# Altium PCB верхняя плата версия 5.PcbDoc (part 2 of 2)
Units mm, origin at the board's own origin, x right, y up, seen from the top; angles counter-clockwise.
Board outline 53 x 45 mm, 4 copper layers (Top Layer, Layer 1, Layer 2, Bottom Layer), stack 1.083 mm thick; 122 components, 141 nets, 822 pads, 327 vias.
Unrouted connection lines stored in the file: 3.
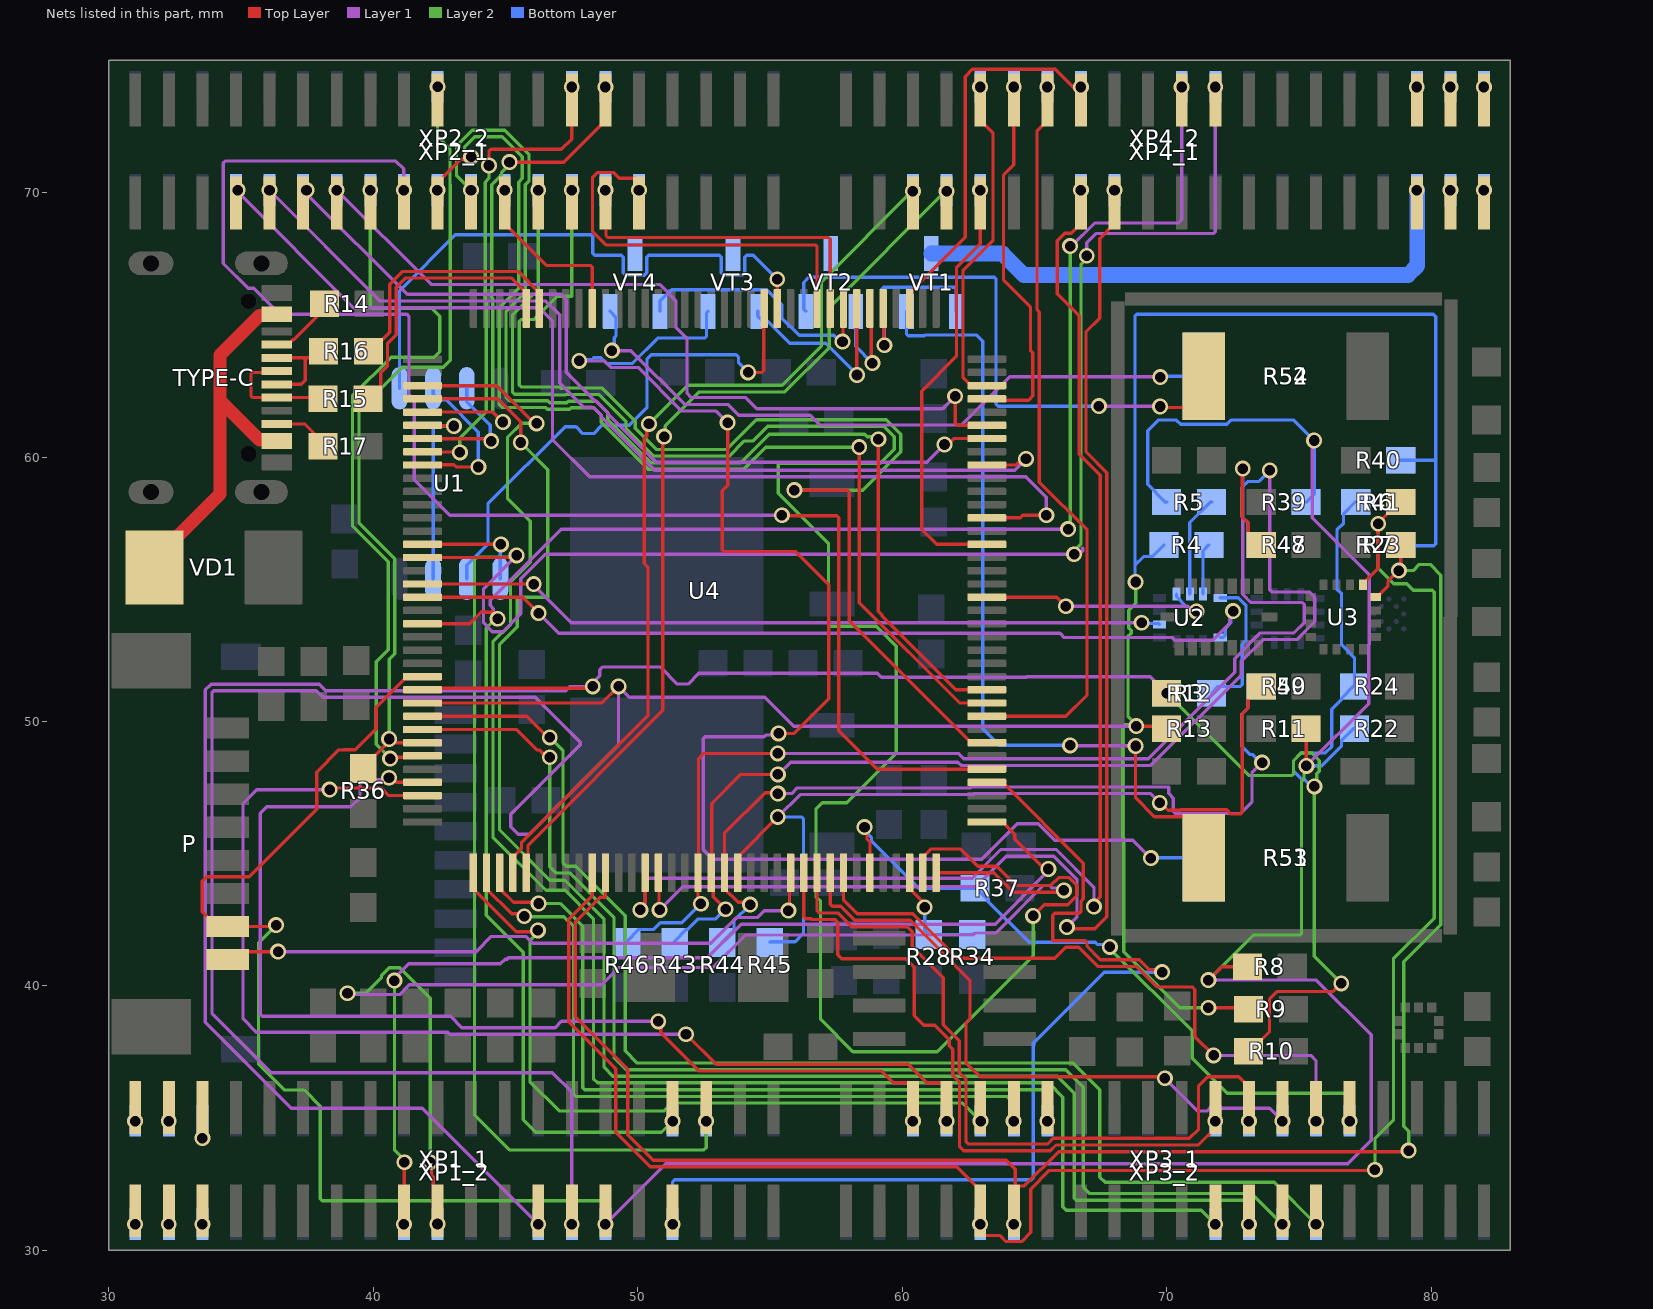
[diagram p4: the nets of this part, all layers, seen from the top]

## Via types
v1: diameter 0.6, hole 0.4, Top Layer to Bottom Layer, 327 vias

## Nets (pads, with @x,y where several pads share a name; then routed paths per layer and width w, separated by ;. In a path a pad name is that pad's centre, name@x,y a point inside that pad or via, vN(x,y) a via of type N, cw(c..) or ccw(c..) an arc to the next point about the centre after c; other vN are vias at no path point) (continued)
NetP_7: P.7 R5.2 R8.1 R11.1 R22.1 R39.1 U4.133 XP1_1.29 XP1_2.29 | length 124.7
  Top Layer w0.125: v1@36.275,42.25 P.7@34.5,42.25 34.1,42.25 33.538,42.813 33.538,43.967 33.695,44.125 35.305,44.125 37.862,46.683 37.862,48.087 38.7,48.925 38.879,48.925 38.891,48.937 39.328,48.937 40.113,49.723 40.113,50.548 41.265,51.7 U4.133@41.86,51.7 ; v1@71.575,40.225 72.075,40.725 R8.1@73.05,40.725 ; v1@75.275,48.325 R11.1@75.275,49.725
  Layer 1 w0.125: v1(48.777,30.993) 51.058,33.275 76.85,33.275 77.738,34.163 77.738,38.151 75.665,40.225 v1(71.575,40.225) ; v1(75.284,48.324) 77.637,50.678 77.637,52.902 77.663,52.927 77.663,55.545 75.5,57.707 75.5,60.552 75.573,60.625 v1(75.575,60.625)
  Layer 2 w0.125: v1(36.325,42.3) 35.663,41.637 35.663,37.041 36.636,36.068 37.382,36.068 38,35.45 38,31.948 38.073,31.875 48.625,31.875 48.777,31.723 v1(48.777,30.993) ; v1(71.575,40.225) 73.276,41.925 75.027,41.925 75.1,41.998 75.1,47.75 75.193,47.843 75.193,48.233 v1(75.284,48.324)
  Bottom Layer w0.125: R5.2@70,58.3 69.95,58.3 69.288,58.962 69.288,61.002 69.686,61.4 70.37,61.4 70.533,61.237 72.267,61.237 72.43,61.4 74.8,61.4 v1(75.575,60.625) 75.575,58.6 R39.1@75.275,58.3 ; v1(75.284,48.324) 75.861,48.324 76.612,49.076 76.612,49.288 77.05,49.725 R22.1@77.1,49.725
NetP_8: P.8 U4.25 | length 23.7
  Top Layer w0.125: P.8@34.5,41 34.8,41.3 v1(36.4,41.3) ; v1(55.694,42.85) 55.737,42.893 55.737,44.218 55.728,44.228 U4.25@55.78,44.28
  Layer 1 w0.125: v1(36.4,41.3) 43.893,41.3 44.467,41.874 45.761,41.874 46.023,41.612 52.756,41.612 53.731,42.587 54.517,42.587 54.78,42.85 v1(55.694,42.85)
NetR3_1: R3.1 U2.1 | length 5.4
  Bottom Layer w0.125: R3.1@71.7,51.075 71.95,51.325 72.789,51.325 72.862,51.398 72.862,52.931 73,53.069 73,54.374 72.699,54.675 U2.1@72.025,54.675
NetR3_2: R3.2 R10.1 R12.2 R24.2 R41.1 U4.134 XP1_1.25 XP1_2.25 | length 108.2
  Top Layer w0.125: U4.134@41.86,51.2 41.924,51.264 48.236,51.264 v1(48.3,51.327) ; R10.1@73.1,37.525 73.15,37.525 73.885,38.26 73.885,39.49 74.19,39.795 76.295,39.795 v1@76.6,40.1
  Layer 1 w0.125: v1(46.237,30.993) 41.849,35.381 36.894,35.381 33.65,38.625 33.65,51.193 33.87,51.412 37.956,51.412 38.206,51.162 47.286,51.162 47.45,51.327 48.198,51.327 48.3,51.225 48.3,51.456 48.568,51.723 48.568,51.949 48.683,52.065 50.85,52.065 51.498,51.416 51.902,51.416 52.313,51.827 59.063,51.827 59.215,51.675 64.698,51.675 64.711,51.688 69.387,51.688 v1(70,51.075)
  Layer 2 w0.125: v1(70,51.075) 73.118,47.957 74.723,47.957 74.796,48.03 74.796,48.526 75.082,48.811 75.486,48.811 75.771,48.526 75.771,48.122 75.678,48.029 75.678,47.639 v1(75.588,47.548) ; v1@75.575,47.525 75.575,41.125 v1(76.6,40.1)
  Bottom Layer w0.125: v1(75.588,47.548) 75.459,47.548 75.179,47.828 75.09,47.828 74.796,48.122 74.796,48.526 75.082,48.811 75.995,48.811 76.238,49.054 76.238,50.463 76.612,50.838 76.612,50.888 77.05,51.325 R24.2@77.1,51.325 77.1,52.408 76.612,52.895 76.612,54.831 76.437,55.006 76.437,57.242 76.687,57.492 76.687,57.863 77.125,58.3 R41.1@77.15,58.3
NetR4_1: R4.1 U2.14 | length 1.9
  Bottom Layer w0.125: U2.14@71.375,54.825 71.375,56.45 R4.1@71.6,56.675
NetR4_2: R4.2 R9.1 R13.1 R23.1 R40.1 U4.135 XP1_1.27 XP1_2.27 | length 142.5
  Top Layer w0.125: U4.135@41.86,50.7 48.648,50.7 v1(49.275,51.327) ; v1(68.85,49.825) 69.9,49.825 R13.1@70,49.725 ; v1(71.575,39.175) 73.05,39.175 R9.1@73.1,39.125
  Layer 1 w0.125: v1(47.507,30.993) 47.507,35.993 46.775,36.725 36.15,36.725 33.9,38.975 33.9,51.089 33.973,51.162 37.852,51.162 38.102,50.912 46.132,50.912 47.828,49.217 47.828,49.113 45.2,46.485 45.2,46.024 45.486,45.739 45.889,45.739 49.275,49.124 v1(49.275,51.327) 49.686,50.916 54.809,50.916 55.9,49.825 v1(68.85,49.825)
  Layer 2 w0.125: v1@68.8,49.875 68.425,49.875 68.337,49.788 68.337,45.625 68.375,45.588 68.375,41.286 70.486,39.175 v1(71.575,39.175) ; v1(68.827,55.275) 68.827,54.472 68.564,54.209 68.564,53.534 68.655,53.443 68.655,53.34 68.537,53.222 68.537,50.202 68.85,49.889 v1(68.85,49.825)
  Bottom Layer w0.125: v1(68.827,55.275) 68.8,55.302 68.8,55.914 ; R4.2@69.9,56.675 69.462,56.237 69.124,56.237 68.8,55.914 ; R23.1@78.85,56.675 78.875,56.65 80.102,56.65 80.175,56.723 80.175,59.925 ; R40.1@78.85,59.875 80.125,59.875 80.175,59.925 ; 68.8,55.914 68.8,65.327 68.873,65.4 80.075,65.4 80.175,65.3 80.175,59.925
NetR5_1: R5.1 U2.13 | length 3.8
  Bottom Layer w0.125: U2.13@70.875,54.825 70.875,57.525 71.65,58.3 R5.1@71.7,58.3
NetR6_1: R6.1 U3.16 U4.10 XP3_1.9 XP3_2.9 | length 75
  Top Layer w0.125: U4.10@48.28,44.28 48.28,43.413 47.387,42.521 47.387,38.649 49.167,36.869 49.167,34.474 50.479,33.163 62.062,33.163 62.787,32.438 62.947,32.278 v1(62.947,30.993) 62.947,30.728 63.112,30.563 63.7,30.563 63.925,30.338 64.512,30.338 64.855,30.68 64.855,32.32 65.56,33.025 v1@77.85,33.025 ; U3.16@77.425,55.175 77.425,55.225 78,55.8 78,57.375 78.025,57.4 v1@78.025,57.451 ; v1(78,57.476) v1@78.025,57.451 ; v1@78.051,57.426 v1@78.025,57.451 ; R6.1@78.85,58.3 78.8,58.3 78.025,57.525 v1@78.025,57.451
  Layer 2 w0.125: v1(77.875,33.05) 77.875,34.225 78.575,34.925 78.575,41.025 80.113,42.563 80.113,54.889 80.039,54.962 79.325,54.962 79.075,55.212 78.585,55.212 78,55.797 v1(78,57.476)
NetR7_1: R7.1 U3.1 U4.11 XP3_1.11 XP3_2.11 | length 70.7
  Top Layer w0.125: U4.11@48.78,44.28 48.78,43.358 48.578,43.358 47.637,42.417 47.637,38.838 49.625,36.85 49.625,34.37 50.583,33.413 63.937,33.413 64.275,33.075 XP3_1.11@64.275,32.33 ; v1(64.217,30.993) 64.217,32.272 XP3_1.11@64.275,32.33 ; U3.1@77.9,54.7 77.95,54.7 78.366,55.116 78.366,55.296 v1(78.778,55.708) ; v1@78.818,55.668 78.85,55.7 R7.1@78.85,56.675 ; v1@79.1,33.8 79.037,33.737 65.919,33.737 64.619,32.438 64.382,32.438 XP3_1.11@64.275,32.33
  Layer 2 w0.125: v1(78.778,55.708) 79.319,55.708 79.548,55.938 79.964,55.938 80.363,55.539 80.363,42.313 78.969,40.919 78.969,34.691 79.15,34.51 v1(79.15,33.775)
NetR14_2: R14.2 TYPE-C.A5 | length 2.7
  Top Layer w0.125: TYPE-C.A5@36.35,64.25 36.77,64.25 36.957,64.437 36.987,64.437 37.862,65.313 37.862,65.363 38.3,65.8 R14.2@38.35,65.8
NetR15_1: R15.1 TYPE-C.A6 TYPE-C.B6 | length 4.8
  Top Layer w0.125: TYPE-C.A6@36.35,63.25 36.3,63.2 35.448,63.2 35.375,63.127 35.375,62.325 35.45,62.25 TYPE-C.B6@36.35,62.25 38.25,62.25 R15.1@38.3,62.2
NetR15_2: R15.2 U4.104 | length 10.5
  Top Layer w0.125: R15.2@40,62.2 40.288,62.488 40.288,63.183 40.538,63.433 40.538,63.815 40.538,64.279 40.875,64.617 40.875,66.429 41.214,66.767 45.227,66.767 45.78,66.215 U4.104@45.78,65.62
NetR16_1: R16.1 TYPE-C.A7 TYPE-C.B7 | length 4.1
  Top Layer w0.125: TYPE-C.A7@36.35,62.75 37.275,62.75 37.425,62.9 37.425,63.677 37.352,63.75 ; TYPE-C.B7@36.35,63.75 37.352,63.75 ; R16.1@38.325,64 38.075,63.75 37.352,63.75
NetR16_2: R16.2 U4.103 | length 9.4
  Top Layer w0.125: R16.2@40.025,64.12 40.625,64.72 40.625,66.532 41.11,67.017 45.478,67.017 46.28,66.215 U4.103@46.28,65.62
NetR17_1: R17.1 TYPE-C.B5 | length 2.3
  Top Layer w0.125: TYPE-C.B5@36.35,61.25 37.4,61.25 38.25,60.4 R17.1@38.3,60.4
NetR28_1: R28.1 R34.2 U4.34 | length 4.3
  Top Layer w0.125: U4.34@60.28,44.28 60.28,43.685 60.759,43.206 60.759,43.066 v1(60.85,42.975)
  Bottom Layer w0.125: v1(60.85,42.975) 60.85,42.1 R28.1@61,41.95 62.646,41.95 R34.2@62.65,41.953
NetR36_1: R36.1 U4.138 XP2_1.20 XP2_2.20 | length 30.7
  Top Layer w0.125: R36.1@39.625,48.225 39.625,48.275 40.6,49.25 v1(40.6,49.339) ; v1@40.559,49.248 40.82,49.248 40.868,49.2 U4.138@41.86,49.2
  Layer 2 w0.125: v1(40.6,49.339) 40.6,52.35 40.813,52.563 40.813,56.148 39.463,57.498 39.463,61.763 41.1,63.4 42.652,63.4 42.914,63.662 42.914,70.295 42.9,70.309 42.9,71.653 42.43,72.123 v1(42.43,74)
NetR37_1: R37.1 U4.31 XP3_1.32 XP3_2.32 | length 26.2
  Top Layer w0.125: v1(58.575,46.008) 58.666,45.917 58.666,45.572 58.78,45.458 U4.31@58.78,44.28
  Layer 2 w0.125: v1(67.852,41.478) 67.852,41.413 70.962,38.302 70.962,37.263 72.283,35.942 76.877,35.942 76.95,35.869 76.95,34.927 v1(76.917,34.893)
  Bottom Layer w0.125: v1(58.575,46.008) 58.575,45.879 58.838,45.617 58.838,45.483 60.62,43.7 62.8,43.7 63.237,43.262 63.237,43.212 64.8,41.65 67.302,41.65 67.383,41.569 67.761,41.569 v1(67.852,41.478)
NetR43_1: R43.1 R48.1 U4.19 | length 43.8
  Top Layer w0.125: v1(53.325,42.9) 52.857,43.368 52.857,44.203 U4.19@52.78,44.28 52.8,44.3 52.8,46.9 53.9,48 v1(55.3,48)
  Layer 1 w0.125: v1(55.3,48) 55.314,48 55.777,48.463 62.1,48.463 62.225,48.337 69.404,48.337 72.823,51.756 72.823,52.278 73.645,53.1 74.918,53.1 75.6,53.782 75.6,54.693 75.393,54.9 73.97,54.9 73.897,54.973 v1(73.897,59.493)
  Bottom Layer w0.125: R43.1@51.4,41.65 51.4,41.7 51.837,42.138 51.887,42.138 52.284,42.534 52.959,42.534 v1(53.325,42.9) ; R48.1@73.575,56.675 73.525,56.675 73.088,57.113 73.088,57.508 72.862,57.733 72.862,58.867 73.069,59.074 73.474,59.074 v1@73.9,59.5
NetR44_1: R44.1 R49.1 U4.20 | length 32.2
  Top Layer w0.125: v1(54.25,43.075) 54.159,43.166 53.799,43.166 53.28,43.685 53.28,45.777 54.813,47.309 55.266,47.309 v1(55.3,47.275)
  Layer 1 w0.125: v1(55.3,47.275) 55.825,47.275 56.037,47.487 62.579,47.487 62.616,47.525 70.075,47.525 70.075,47.279 70.25,47.104 70.25,46.598 70.323,46.525 72.796,46.525 73.225,46.954 73.225,48.06 v1(73.61,48.445)
  Bottom Layer w0.125: R44.1@53.2,41.65 53.638,42.088 53.638,42.462 v1(54.25,43.075) ; R49.1@73.575,51.325 73.525,51.325 73.087,50.888 73.087,50.517 72.862,50.292 72.862,49.038 73.144,48.756 73.232,48.756 73.544,48.445 v1(73.61,48.445)
NetR45_1: R45.1 R50.1 U4.21 | length 32.8
  Top Layer w0.125: U4.21@53.78,44.28 53.78,44.875 55.297,46.392 v1(55.297,46.393) ; v1(69.739,46.925) 69.775,46.925 70.05,46.65 70.52,46.65 70.533,46.663 72.267,46.663 72.43,46.5 72.789,46.5 72.862,46.573 72.862,50.292 73.088,50.517 73.088,50.888 73.525,51.325 R50.1@73.575,51.325
  Layer 1 w0.125: v1(55.297,46.393) 56.141,47.237 62.682,47.237 62.72,47.275 69.389,47.275 v1(69.739,46.925)
  Bottom Layer w0.125: R45.1@55,41.65 55.025,41.675 55.95,41.675 56.266,41.991 56.266,46.32 56.193,46.393 v1(55.297,46.393)
NetR46_1: R46.1 R47.1 U4.18 | length 45.7
  Top Layer w0.125: v1@52.5,43 52.28,43.22 U4.18@52.28,44.28 52.3,44.3 52.3,48.6 52.493,48.793 v1(55.297,48.793) ; v1@72.875,59.525 72.862,59.512 72.862,57.733 73.088,57.508 73.088,57.112 73.525,56.675 R47.1@73.575,56.675
  Layer 1 w0.125: v1@55.3,48.8 55.307,48.793 62.123,48.793 62.329,48.587 69.301,48.587 72.573,51.86 72.573,52.382 73.541,53.35 74.814,53.35 75.2,53.736 75.2,54.427 75.127,54.5 73.183,54.5 72.877,54.806 v1(72.877,59.561)
  Bottom Layer w0.125: R46.1@49.6,41.65 49.6,41.7 50.038,42.138 50.608,42.138 50.858,42.387 51.668,42.387 v1(52.39,43.11)
NetR51_1: R51.1 VT1.2 | length 30.5
  Top Layer w0.125: v1(68.825,49.075) 68.825,47.113 69.538,46.4 70.663,46.4 71.4,45.662 R51.1@71.4,44.85
  Layer 1 w0.125: v1(66.35,49.1) 66.362,49.088 68.812,49.088 v1(68.825,49.075)
  Bottom Layer w0.125: VT1.2@60.16,65.508 60.16,64.66 60.233,64.587 60.842,64.587 60.868,64.612 62.814,64.612 63.05,64.377 63.05,49.725 63.675,49.1 v1(66.35,49.1)
NetR52_1: R52.1 VT2.2 | length 21.9
  Top Layer w0.125: v1@69.75,61.875 70.663,61.875 71.4,62.612 R52.1@71.4,63.05
  Layer 1 w0.125: v1(67.438,61.926) 67.445,61.919 69.744,61.919 v1(69.752,61.911)
  Bottom Layer w0.125: VT2.2@56.36,65.508 56.275,65.593 56.275,66.6 56.475,66.8 63.477,66.8 63.55,66.727 63.55,62 63.623,61.926 v1(67.438,61.926)
NetR53_1: R53.1 VT3.2 | length 56.5
  Top Layer w0.125: v1(53.4,61.3) 53.4,58.935 53.2,58.735 53.2,56.498 53.273,56.425 55.975,56.425 57.225,55.175 57.225,50.865 55.91,49.55 v1(55.325,49.55)
  Layer 1 w0.125: v1(47.787,63.634) 48.726,63.634 48.973,63.388 50.02,63.388 51.668,61.739 52.961,61.739 v1(53.4,61.3) ; v1(55.325,49.55) 55.263,49.488 54.838,49.488 54.775,49.425 52.548,49.425 52.475,49.352 52.475,45.16 52.848,44.787 63.002,44.787 64.353,46.138 65.147,46.138 65.772,45.512 68.725,45.512 v1(69.402,44.836)
  Bottom Layer w0.125: v1(47.787,63.634) 47.841,63.687 48.275,63.687 48.337,63.75 48.611,63.75 48.823,63.537 49.787,63.537 50.75,64.5 52.527,64.5 52.6,64.573 52.6,65.448 VT3.2@52.66,65.508 ; v1@69.4,44.8 69.45,44.85 R53.1@71.4,44.85
NetR54_1: R54.1 VT4.2 | length 25.9
  Layer 1 w0.125: v1(49.025,64.025) 49.736,64.025 51.771,61.989 53.4,61.989 53.814,61.575 56.517,61.575 56.877,61.215 62.25,61.215 64.068,63.034 69.748,63.034 v1(69.757,63.025)
  Bottom Layer w0.125: VT4.2@48.96,65.508 49.177,65.291 49.177,64.575 49.115,64.512 49.115,64.115 v1(49.025,64.025) ; v1(69.757,63.025) 69.782,63.05 R54.1@71.4,63.05
NetTYPE-C_A4_B9: TYPE-C.A4_B9 TYPE-C.B4_A9 VD1.1 | length 14.6
  Top Layer w0.5: VD1.1@31.725,55.825 31.725,56.125 34.2,58.6 34.2,62.145 ; TYPE-C.B4_A9@36.35,60.6 36.3,60.65 35.695,60.65 34.2,62.145 ; TYPE-C.A4_B9@36.35,65.4 36.3,65.35 35.695,65.35 34.2,63.855 34.2,62.145
NetU1_1: U1.1 U4.123 | length 4.3
  Top Layer w0.125: U4.123@41.86,56.7 v1(44.825,56.7)
  Bottom Layer w0.125: U1.1@44.805,55.4 44.805,56.68 v1(44.825,56.7)
NetU1_2: U1.2 U4.86 | length 20
  Top Layer w0.125: v1(54.175,63.2) 54.689,63.2 54.762,63.273 54.762,65.602 U4.86@54.78,65.62
  Bottom Layer w0.125: U1.2@43.535,55.4 43.535,55.9 44.338,56.703 44.338,58.229 47.261,61.151 47.666,61.151 47.93,60.888 48.334,60.888 48.648,61.202 49.688,61.202 50.35,61.864 50.35,63.7 50.513,63.863 53.717,63.863 53.813,63.767 53.813,63.562 v1(54.175,63.2)
NetU1_3: U1.3 U4.114 | length 7.7
  Top Layer w0.125: U4.114@41.86,61.2 41.873,61.187 43.035,61.187 v1(43.047,61.175)
  Bottom Layer w0.125: U1.3@42.265,55.4 42.265,61.102 42.338,61.175 v1(43.047,61.175)
NetU1_5: U1.5 U4.85 | length 23.6
  Top Layer w0.125: v1(55.275,66.725) 55.278,66.722 55.278,65.622 U4.85@55.28,65.62
  Bottom Layer w0.125: U1.5@40.995,62.6 40.995,66.295 43.1,68.4 48.227,68.4 48.3,68.327 48.3,67.698 48.373,67.625 49.385,67.625 49.458,67.552 49.458,66.965 49.553,66.869 50.247,66.869 50.342,66.965 50.342,67.552 50.415,67.625 53.085,67.625 53.158,67.552 53.158,66.965 53.253,66.869 53.947,66.869 54.042,66.965 54.042,67.552 54.115,67.625 54.375,67.625 v1(55.275,66.725)
NetU1_6: U1.6 U4.117 | length 6
  Top Layer w0.125: U4.117@41.86,59.7 41.872,59.712 43.048,59.712 43.136,59.625 v1(43.975,59.625)
  Bottom Layer w0.125: U1.6@42.265,62.6 42.265,62.379 42.484,62.159 42.752,62.159 43.975,60.937 v1(43.975,59.625)
NetU1_7: U1.7 U4.115 | length 5
  Top Layer w0.125: U4.115@41.86,60.7 41.873,60.687 44.375,60.687 v1(44.463,60.6)
  Bottom Layer w0.125: U1.7@43.535,62.6 43.535,62.1 44.425,61.21 44.425,60.638 v1(44.463,60.6)
NetU2_4: U2.4 U4.127 | length 33.2
  Top Layer w0.125: U4.127@41.86,54.7 45.65,54.7 v1(46.25,54.1)
  Layer 1 w0.125: v1(46.25,54.1) 47.012,53.338 65.97,53.338 66.132,53.175 70.21,53.175 70.313,53.072 71.734,53.072 72.386,53.724 72.386,53.917 72.513,54.044 v1(72.513,54.173)
  Bottom Layer w0.125: U2.4@72.025,53.175 72.125,53.175 72.213,53.262 72.213,53.513 72.43,53.73 72.43,54.09 v1(72.513,54.173)
NetU2_9: U2.9 U4.126 | length 28.5
  Top Layer w0.125: U4.126@41.86,55.2 46.062,55.2 v1(46.068,55.194)
  Layer 1 w0.125: v1(46.068,55.194) 46.068,55.157 47.489,53.736 v1(69.052,53.736)
  Bottom Layer w0.125: v1(69.052,53.736) 69.082,53.706 69.694,53.706 U2.9@69.725,53.675
NetU2_12: U2.12 U4.54 | length 9.2
  Top Layer w0.125: U4.54@63.2,54.7 65.85,54.7 v1@66.175,54.375
  Layer 1 w0.125: v1(66.189,54.357) 70.802,54.357 70.996,54.162 v1(71.125,54.162)
  Bottom Layer w0.125: U2.12@70.375,54.825 70.375,54.725 70.563,54.538 70.563,54.508 70.817,54.253 71.034,54.253 v1(71.125,54.162)
NetU4_1: U4.1 XP3_1.10 XP3_2.10 | length 27.5
  Top Layer w0.125: U4.1@43.78,44.28 43.78,43.685 45.415,42.05 46.175,42.05 v1(46.225,42.1)
  Layer 2 w0.125: v1(46.225,42.1) 46.225,42.014 45.925,41.714 45.925,36.375 47.025,35.275 51.009,35.275 51.309,35.575 62.281,35.575 v1(62.963,34.893)
NetU4_2: U4.2 XP3_1.12 XP3_2.12 | length 28.3
  Top Layer w0.125: U4.2@44.28,44.28 44.28,43.685 45.236,42.729 45.618,42.729 v1(45.708,42.638)
  Layer 2 w0.125: v1(45.708,42.638) 45.728,42.619 47.212,42.619 47.575,42.255 47.575,35.898 47.648,35.825 63.95,35.825 64.225,35.55 64.225,34.906 v1(64.212,34.893)
NetU4_3: U4.3 XP3_1.14 XP3_2.14 | length 29.1
  Top Layer w0.125: U4.3@44.78,44.28 44.78,43.685 45.303,43.163 46.208,43.163 v1(46.25,43.12)
  Layer 2 w0.125: v1(46.25,43.12) 47.064,43.12 47.925,42.259 47.925,36.148 47.998,36.075 65.3,36.075 65.498,35.877 65.498,35.5 65.487,35.489 v1(65.487,34.893)
NetU4_4: U4.4 XP4_1.5 XP4_2.5 | length 34.3
  Top Layer w0.125: U4.4@45.28,44.28 45.28,44.875 45.602,45.197 45.602,45.424 50.388,50.209 50.388,55.838 50.25,55.975 50.25,60.702 50.336,60.788 50.336,61.161 v1(50.427,61.252)
  Layer 2 w0.125: v1(50.427,61.252) 51.887,62.712 55.458,62.712 56.95,64.204 56.95,66.637 60.363,70.05 v1(60.407,70.05)
NetU4_5: U4.5 XP4_1.7 XP4_2.7 | length 34.3
  Top Layer w0.125: U4.5@45.78,44.28 45.78,44.88 45.852,44.953 45.852,45.321 50.95,50.418 v1@50.95,60.8
  Layer 2 w0.125: v1(51,60.775) 51.038,60.813 51.038,61.177 52.323,62.462 55.562,62.462 57.237,64.137 57.237,65.654 61.633,70.05 v1(61.677,70.05)
NetU4_14: U4.14 XP4_1.15 XP4_2.15 | length 49.8
  Top Layer w0.125: v1(50.1,42.875) 50.1,43.004 50.28,43.184 U4.14@50.28,44.28 ; v1(66.757,70.093) 66.757,68.822 66.397,68.462 66.149,68.462 65.863,68.176 65.863,66.176 66.7,65.339 66.7,60.101 67.49,59.311 67.49,54.073 67.487,54.071 67.487,43.366 67.25,43.129 v1(67.25,43)
  Layer 1 w0.125: v1(50.1,42.875) 50.275,43.05 50.275,44.002 50.348,44.075 62.644,44.075 63.73,45.161 65.83,45.161 67.25,43.742 v1(67.25,43)
NetU4_15: U4.15 XP4_1.17 XP4_2.17 | length 50.4
  Top Layer w0.125: U4.15@50.78,44.28 50.802,44.258 50.802,42.898 v1(50.825,42.875) ; v1(66.225,42.225) 66.288,42.163 67.277,42.163 67.737,42.623 67.737,53.967 67.74,53.969 67.74,59.415 66.95,60.204 66.95,64.735 67.464,65.249 67.464,68.259 68.027,68.822 v1(68.027,70.093)
  Layer 1 w0.125: v1(50.825,42.875) 51.7,43.75 62.775,43.75 63.936,44.911 65.727,44.911 66.613,44.025 66.613,42.613 v1(66.225,42.225)
NetU4_26: U4.26 XP3_1.24 XP3_2.24 | length 25.4
  Top Layer w0.125: U4.26@56.28,44.28 56.28,42.611 56.353,42.538 56.566,42.538 56.591,42.513 57.467,42.513 57.563,42.417 57.563,41.188 57.722,41.028 60.13,41.028 60.453,40.705 60.453,38.882 60.824,38.512 61.227,38.512 61.774,37.965 61.774,37.737 61.911,37.6 61.911,36.624 62.164,36.371 62.164,33.932 62.321,33.775 65.603,33.775 65.816,33.987 71.202,33.987 71.837,34.622 v1(71.837,34.893)
NetU4_27: U4.27 XP3_1.26 XP3_2.26 | length 28.3
  Top Layer w0.125: U4.27@56.78,44.28 56.78,42.836 56.853,42.763 57.571,42.763 58.099,42.234 60.194,42.234 60.375,42.053 60.375,41.49 61.55,40.315 61.55,38.543 62.161,37.932 62.161,36.728 62.414,36.474 62.414,34.109 62.498,34.025 65.499,34.025 65.712,34.237 70.862,34.237 71.205,34.58 71.205,36.22 71.548,36.562 72.722,36.562 73.107,36.178 v1(73.107,34.893)
NetU4_28: U4.28 XP3_1.28 XP3_2.28 | length 23.8
  Top Layer w0.125: U4.28@57.28,44.28 57.28,43.086 57.353,43.013 57.674,43.013 58.203,42.484 60.298,42.484 62.563,40.219 62.563,38.748 62.411,38.595 62.411,37.102 62.95,36.562 69.884,36.562 v1(69.935,36.512)
  Layer 1 w0.125: v1(69.935,36.512) 71.176,35.271 71.525,35.271 71.635,35.381 73.889,35.381 v1(74.377,34.893)
NetU4_29: U4.29 XP3_1.30 XP3_2.30 | length 25.1
  Top Layer w0.125: U4.29@57.78,44.28 57.78,43.26 58.306,42.734 60.401,42.734 62.085,41.05 65.762,41.05 66.175,41.463 66.67,41.463 67.392,40.74 68.856,40.74 69.634,39.963 70.967,39.963 71.063,39.867 71.063,38.087 v1(71.775,37.375)
  Layer 1 w0.125: v1(71.775,37.375) 75.45,37.375 75.647,37.178 v1(75.647,34.893)
NetU4_35: U4.35 XP2_1.25 XP2_2.25 | length 76.5
  Top Layer w0.125: U4.35@60.78,44.28 60.78,44.875 61.083,45.178 62.208,45.178 62.856,44.53 63.567,44.53 64.297,43.8 65.611,43.8 65.911,44.1 66.314,44.1 66.6,43.814 66.6,43.411 66.265,43.076 65.376,43.076 v1(64.95,42.65)
  Layer 2 w0.125: v1(46.237,70.093) 46.237,66.15 46.043,66.15 45.268,65.375 45.268,62.449 45.341,62.376 46.706,62.376 46.736,62.346 47.26,62.346 47.277,62.363 48.541,62.363 49.555,61.349 49.555,61.081 50.598,60.037 53.466,60.037 54.037,60.608 54.367,60.608 54.921,61.163 59.302,61.163 59.7,60.764 59.7,60.3 59.162,59.762 55.312,59.762 55.312,58.627 57.215,56.724 57.215,53.6 59.025,53.6 59.775,52.85 59.775,48.8 57.9,46.925 56.986,46.925 56.738,46.677 56.738,43.38 56.913,43.205 56.913,38.737 58.138,37.512 61.327,37.512 64.95,41.135 v1(64.95,42.65)
NetU4_36: U4.36 XP1_1.19 XP1_2.19 | length 46.8
  Top Layer w0.125: v1(42.15,33.337) 42.205,33.283 42.205,32.85 42.267,32.787 42.267,31.163 v1(42.43,31) ; U4.36@61.28,44.28 63.464,44.28 64.194,43.55 66.05,43.55 v1(66.112,43.612)
  Layer 1 w0.125: v1(39.025,39.725) 39.075,39.675 41,39.675 41.366,40.041 48.647,40.041 49.306,40.7 52.85,40.7 54.075,41.925 62.675,41.925 62.75,42 63.529,42 65.329,43.8 65.572,43.8 65.668,43.703 66.022,43.703 v1(66.112,43.612)
  Layer 2 w0.125: v1(39.025,39.725) 39.714,39.725 40.313,40.323 40.313,40.403 40.598,40.689 41.002,40.689 42.15,39.54 v1@42.15,33.338
NetU4_37: U4.37 XP1_1.17 XP1_2.17 | length 39.1
  Top Layer w0.125: v1(41.157,30.993) 41.175,31.012 v1(41.175,33.337) ; U4.37@63.2,46.2 63.795,46.2 64.26,45.735 64.26,45.55 65.296,44.514 65.434,44.514 v1(65.525,44.423)
  Layer 1 w0.125: v1(40.8,40.201) 40.8,40.3 41.337,40.837 44.806,40.837 44.986,41.016 45.061,41.016 45.107,41.063 52.637,41.063 53.912,42.337 63.513,42.337 65.525,44.349 v1(65.525,44.423)
  Layer 2 w0.125: v1(40.8,40.201) 40.8,33.8 41.175,33.425 v1(41.175,33.337)
NetU4_40: U4.40 XP1_1.33 XP1_2.33 | length 40
  Top Layer w0.125: U4.40@63.2,47.7 63.795,47.7 66.85,44.645 66.85,43.289 66.762,43.202 66.762,42.823 66.689,42.75 65.761,42.75 65.687,42.677 65.687,41.713 66.914,41.713 66.987,41.639 66.987,41.498 67.495,40.99 68.96,40.99 69.337,40.613 69.737,40.613 v1(69.825,40.525)
  Bottom Layer w0.125: v1(51.317,30.993) 51.317,32.592 51.4,32.675 64.877,32.675 64.95,32.748 64.95,37.842 67.633,40.525 v1(69.825,40.525)
NetU4_41: U4.41 XP2_1.17 XP2_2.17 | length 56.6
  Top Layer w0.125: v1(55.45,57.8) 55.475,57.775 57.527,57.775 57.6,57.702 57.6,49.65 59.05,48.2 U4.41@63.2,48.2
  Layer 1 w0.125: v1(41.157,70.093) 41.157,70.893 40.858,71.192 34.398,71.192 34.325,71.119 34.325,67.318 35.266,66.377 35.482,66.377 36.459,65.4 41.277,65.4 41.35,65.327 41.35,62.375 41.55,62.175 41.55,59.15 42.9,57.8 v1(55.45,57.8)
NetU4_43: U4.43 XP2_1.27 XP2_2.27 | length 44.5
  Top Layer w0.125: v1(55.925,58.75) 57.927,58.75 58,58.677 58,53.805 62.605,49.2 U4.43@63.2,49.2
  Layer 2 w0.125: v1(47.507,70.093) 47.507,66.075 46.95,66.075 46.075,65.2 45.591,65.2 45.518,65.127 45.518,62.723 45.591,62.65 47.036,62.65 47.09,62.596 47.157,62.596 47.173,62.613 48.644,62.613 49.907,61.35 49.907,61.082 50.702,60.287 53.362,60.287 54.488,61.413 59.405,61.413 59.95,60.868 59.95,60.196 58.504,58.75 v1(55.925,58.75)
NetU4_45: U4.45 XP4_1.14 XP4_2.14 | length 28.1
  Top Layer w0.125: U4.45@63.2,50.2 66.189,50.2 66.987,50.998 66.987,54.278 66.99,54.28 66.99,57.25 65.188,59.052 65.188,65.473 65.1,65.561 65.1,72.335 65.487,72.722 v1(65.487,73.993)
NetU4_46: U4.46 XP2_1.19 XP2_2.19 | length 42.3
  Top Layer w0.125: v1(42.427,70.093) 42.427,70.372 43.314,71.259 43.609,71.259 v1(43.7,71.35) ; v1(58.375,60.375) 58.375,54.496 62.171,50.7 U4.46@63.2,50.7
  Layer 2 w0.125: v1(43.7,71.35) 43.7,71.375 43.452,71.623 43.452,71.727 43.838,72.113 44.877,72.113 45.638,71.352 45.638,70.537 45.499,70.399 45.499,66.382 44.768,65.65 44.768,61.982 44.874,61.876 46.499,61.876 46.573,61.802 47.423,61.802 47.484,61.863 48.334,61.863 48.619,61.577 48.619,61.309 50.391,59.537 54.004,59.537 54.841,60.375 v1(58.375,60.375)
NetU4_47: U4.47 XP2_1.21 XP2_2.21 | length 42.5
  Top Layer w0.125: v1(59.1,60.675) 59.1,54.161 59.25,54.011 59.25,53.975 62.025,51.2 U4.47@63.2,51.2
  Layer 2 w0.125: v1(43.697,70.093) 43.15,70.64 43.15,71.779 43.734,72.363 44.98,72.363 45.888,71.455 45.888,70.433 45.749,70.295 45.749,66.225 45.018,65.493 45.018,62.257 45.149,62.126 46.603,62.126 46.677,62.052 47.319,62.052 47.38,62.113 48.437,62.113 48.869,61.681 48.869,61.413 50.495,59.787 53.9,59.787 54.975,60.863 58.577,60.863 58.674,60.766 59.009,60.766 v1(59.1,60.675)
NetU4_58: U4.58 XP4_1.9 XP4_2.9 | length 16.4
  Top Layer w0.125: v1(62.947,70.093) 62.947,68.059 62.053,67.165 62.053,63.803 60.737,62.487 60.737,57.261 61.298,56.7 U4.58@63.2,56.7
NetU4_60: U4.60 XP2_1.7 XP2_2.7 | length 41
  Top Layer w0.125: U4.60@63.2,57.7 64.463,57.7 64.563,57.8 v1(65.45,57.8)
  Layer 1 w0.125: v1(34.875,70.093) 34.875,70.025 39.25,65.65 46.275,65.65 46.775,65.15 46.775,60.664 48.189,59.25 64.675,59.25 65.45,58.475 v1(65.45,57.8)
NetU4_64: U4.64 XP2_1.9 XP2_2.9 | length 36.3
  Top Layer w0.125: U4.64@63.2,59.7 64.321,59.7 64.554,59.932 v1(64.682,59.932)
  Layer 1 w0.125: v1(36.077,70.093) 40.27,65.9 46.525,65.9 47.05,65.375 47.05,62.8 47.964,61.886 48.261,61.886 48.284,61.863 48.334,61.863 48.619,61.577 48.619,61.527 50.646,59.5 64.25,59.5 v1(64.682,59.932)
NetU4_66: U4.66 XP2_1.11 XP2_2.11 | length 32.1
  Top Layer w0.125: v1(61.6,60.475) 61.729,60.475 61.954,60.7 U4.66@63.2,60.7
  Layer 1 w0.125: v1(37.475,70.093) 37.475,69.965 41.29,66.15 47.1,66.15 47.3,65.95 47.3,63.2 48.387,62.113 48.437,62.113 48.869,61.681 48.869,61.631 50.7,59.8 60.925,59.8 v1(61.6,60.475)
NetU4_67: U4.67 XP2_1.13 XP2_2.13 | length 31.1
  Top Layer w0.125: v1(62.001,62.3) 62.001,61.273 62.074,61.2 U4.67@63.2,61.2
  Layer 1 w0.125: v1(38.617,70.093) 42.185,66.525 50.825,66.525 51.45,65.9 51.45,64.882 51.866,64.466 51.866,62.416 52.032,62.25 54.082,62.25 54.507,61.825 61.526,61.825 v1(62.001,62.3)
NetU4_69: U4.69 XP4_1.12 XP4_2.12 | length 14.1
  Top Layer w0.125: U4.69@63.2,62.2 63.25,62.15 64.777,62.15 64.938,62.311 64.938,63.949 64.85,64.037 64.85,65.675 63.832,66.692 63.832,70.667 64.217,71.051 v1(64.217,73.993)
NetU4_70: U4.70 XP4_1.10 XP4_2.10 | length 12.7
  Top Layer w0.125: v1(62.947,73.993) 62.947,72.728 63.434,72.241 63.434,68.193 62.303,67.061 62.303,63.003 62.605,62.7 U4.70@63.2,62.7
NetU4_75: U4.75 XP4_1.16 XP4_2.16 | length 14.7
  Top Layer w0.125: U4.75@60.28,65.62 60.28,66.215 62.379,68.314 62.379,74.384 62.658,74.663 65.782,74.663 v1@66.535,73.91 ; XP4_1.16@66.76,73.5 XP4_1.16@66.76,73.99
  other v1: 66.757,73.993
NetU4_77: U4.77 VT1.1 | length 7.3
  Top Layer w0.125: U4.77@59.28,65.62 59.302,65.597 59.302,64.248 v1(59.325,64.225)
  Bottom Layer w0.125: v1(59.325,64.225) 59.325,65.303 59.225,65.403 59.225,66.352 59.298,66.425 61.967,66.425 62.04,66.352 VT1.1@62.04,65.508
NetU4_78: U4.78 VT2.1 | length 4.3
  Top Layer w0.125: U4.78@58.78,65.62 58.828,65.572 58.828,63.599 v1(58.875,63.551)
  Bottom Layer w0.125: VT2.1@58.24,65.508 58.24,64.185 v1(58.875,63.551)
NetU4_79: U4.79 VT3.1 | length 7.4
  Top Layer w0.125: U4.79@58.28,65.62 58.286,65.614 58.286,63.108 v1(58.292,63.102)
  Bottom Layer w0.125: VT3.1@54.54,65.508 54.54,65.331 54.757,65.114 54.933,65.114 55.748,64.3 57.118,64.3 58.3,63.118 v1@58.3,63.1
NetU4_80: U4.80 VT4.1 | length 9.9
  Top Layer w0.125: v1(57.741,64.366) 57.761,64.386 57.761,65.601 U4.80@57.78,65.62
  Bottom Layer w0.125: VT4.1@50.84,65.508 50.84,65.889 51.282,66.331 54.887,66.331 55.45,65.767 55.45,65.248 56.098,64.6 57.414,64.6 57.648,64.366 v1(57.741,64.366)
NetU4_81: U4.81 XP2_1.29 XP2_2.29 | length 12.9
  Top Layer w0.125: v1(48.777,70.093) 48.8,70.07 48.8,68.373 48.873,68.3 57.207,68.3 57.28,68.227 U4.81@57.28,65.62
NetU4_82: U4.82 XP2_1.31 XP2_2.31 | length 15.4
  Top Layer w0.125: v1(50.047,70.093) 50.047,70.378 49.887,70.538 49.3,70.538 49.075,70.763 48.488,70.763 48.289,70.564 48.289,68.531 48.8,68.02 56.707,68.02 56.78,67.947 U4.82@56.78,65.62
NetU4_99: U4.99 XP2_1.23 XP2_2.23 | length 6.3
  Top Layer w0.125: XP2_1.23@44.97,69.6 44.97,68.825 46.55,67.245 48.207,67.245 48.28,67.172 U4.99@48.28,65.62
  other v1: 44.967,70.093
NetU4_111: U4.111 XP3_1.23 XP3_2.23 | length 61.6
  Top Layer w0.125: U4.111@41.86,62.7 44.666,62.7 46.091,61.275 v1(46.175,61.275)
  Layer 2 w0.125: v1(46.175,61.275) 45.611,61.275 45.075,60.739 45.075,58.445 45.94,57.58 45.94,56.024 45.191,55.276 45.191,53.683 44.525,53.017 44.525,45.623 46.532,43.617 47.257,43.617 48.325,42.548 48.325,36.498 48.486,36.337 65.538,36.337 66.075,35.8 66.075,31.65 66.2,31.525 71.305,31.525 v1(71.837,30.993)
NetU4_112: U4.112 XP3_1.25 XP3_2.25 | length 61.9
  Top Layer w0.125: U4.112@41.86,62.2 44.714,62.2 45.575,61.339 v1(45.575,60.55)
  Layer 2 w0.125: v1(45.575,60.55) 46.6,59.525 46.6,54.7 45.515,54.7 45.441,54.627 45.441,53.58 44.775,52.913 44.775,45.898 46.673,44 47.25,44 48.725,42.525 48.725,36.923 49.061,36.587 65.863,36.587 66.5,35.95 66.5,31.973 66.573,31.9 72.925,31.9 73.107,31.718 v1(73.107,30.993)
NetU4_113: U4.113 XP2_1.30 XP2_2.30 | length 18.5
  Top Layer w0.125: U4.113@41.86,61.7 44.525,61.7 v1(44.9,61.325) ; v1(45.15,71.15) 47.205,71.15 48.78,72.725 XP2_1.30@48.78,73.5
  Layer 2 w0.125: v1(44.9,61.325) 44.518,61.707 44.518,65.982 44.479,66.02 44.479,70.295 44.85,70.666 44.85,70.761 45.15,71.061 v1(45.15,71.15)
  other v1: 48.777,73.993
NetU4_116: U4.116 XP2_1.28 XP2_2.28 | length 18.6
  Top Layer w0.125: U4.116@41.86,60.2 41.873,60.187 43.263,60.187 v1(43.275,60.175) ; v1(44.375,71.025) 44.375,71.564 44.448,71.638 47.113,71.638 47.5,72.025 47.5,73.986 v1(47.507,73.993)
  Layer 2 w0.125: v1(43.275,60.175) 43.275,60.713 44.268,61.706 44.268,65.878 44.229,65.917 44.229,70.399 44.375,70.544 v1(44.375,71.025)
NetU4_124: U4.124 XP1_1.36 XP1_2.36 XP4_1.24 XP4_2.24 | length 87.1
  Top Layer w0.125: U4.124@41.86,56.2 45.342,56.2 v1(45.422,56.28)
  Layer 1 w0.125: v1(45.422,56.28) 44.169,55.027 44.169,53.731 44.502,53.398 44.906,53.398 45.58,54.072 45.58,55.396 46.509,56.325 66.7,56.325 66.823,56.448 66.823,56.552 66.812,56.563 ; v1(66.977,67.609) 66.977,68.102 67.325,68.45 71.763,68.45 71.837,68.523 v1(71.837,73.993)
  Layer 2 w0.125: v1(45.422,56.28) 45.354,56.212 43.923,56.212 43.825,56.113 43.825,35.125 45.15,33.8 52.5,33.8 52.587,33.887 v1(52.587,34.893) ; v1(66.502,56.325) 66.502,56.453 66.763,56.714 66.763,67.299 66.977,67.513 v1(66.977,67.609)
NetU4_129: U4.129 XP1_1.34 XP1_2.34 XP4_1.22 XP4_2.22 | length 73.1
  Top Layer w0.125: U4.129@41.86,53.7 43.644,53.7 44.093,54.149 44.218,54.149 44.238,54.129 44.552,54.129 44.704,53.976 v1(44.704,53.885)
  Layer 1 w0.125: v1(44.704,53.885) 44.704,54.014 44.542,54.175 44.542,54.267 44.419,54.39 44.419,54.588 47.106,57.275 v1(66.275,57.275) ; v1@66.375,67.95 67.275,68.85 70.45,68.85 70.575,68.975 70.575,73.985 v1(70.567,73.993)
  Layer 2 w0.125: v1(44.704,53.885) 44.624,53.885 44.275,53.536 44.275,42.675 45.675,41.275 45.675,34.948 46.148,34.475 50.898,34.475 v1(51.317,34.893) ; v1(66.275,57.275) 66.35,57.35 v1(66.35,67.975)
NetU4_136: U4.136 XP3_1.29 XP3_2.29 | length 49.2
  Top Layer w0.125: U4.136@41.86,50.2 45.8,50.2 46.6,49.4 v1(46.675,49.4)
  Layer 2 w0.125: v1(46.675,49.4) 47.175,48.9 47.175,44.65 47.3,44.525 47.65,44.525 49.525,42.65 49.525,37.548 49.986,37.087 66.463,37.087 67.475,36.075 67.475,32.775 67.675,32.575 74.065,32.575 v1(75.647,30.993)
NetU4_137: U4.137 XP3_1.27 XP3_2.27 | length 48
  Top Layer w0.125: U4.137@41.86,49.7 45.4,49.7 46.174,48.926 46.27,48.926 46.546,48.65 v1(46.675,48.65)
  Layer 2 w0.125: v1(46.675,48.65) 46.675,44.5 46.9,44.275 47.425,44.275 49.1,42.6 49.1,37.298 49.561,36.837 66.188,36.837 66.85,36.175 66.85,32.398 67.098,32.15 73.22,32.15 v1(74.377,30.993)
NetU4_139: U4.139 XP2_1.15 XP2_2.15 | length 28.4
  Top Layer w0.125: v1(40.64,48.6) 40.69,48.65 41.81,48.65 U4.139@41.86,48.7
  Layer 2 w0.125: v1(39.887,70.093) 39.887,65.713 39.975,65.625 42.214,65.625 42.513,65.326 42.513,63.988 42.287,63.762 41.432,63.762 41.419,63.775 40.673,63.775 39.213,62.315 39.213,57.394 40.563,56.044 40.563,52.707 40.113,52.257 40.113,49.137 40.64,48.61 v1(40.64,48.6)
NetU4_141: U4.141 XP3_1.6 XP3_2.6 | length 42.2
  Top Layer w0.125: v1(40.595,47.873) 40.705,47.873 40.869,47.709 40.891,47.709 40.9,47.7 U4.141@41.86,47.7 ; v1(50.775,38.663) 50.866,38.572 50.866,38.234 52.313,36.787 59.207,36.787 59.657,36.337 60.247,36.337 60.407,36.178 v1(60.407,34.893)
  Layer 1 w0.125: v1(40.595,47.873) 40.522,47.8 39.573,47.8 39.5,47.727 39.5,47.125 39.15,46.775 35.975,46.775 35.725,46.525 35.725,38.923 35.798,38.85 42.923,38.85 43.348,38.425 46.879,38.425 47.116,38.663 v1(50.775,38.663)
NetU4_142: U4.142 XP3_1.8 XP3_2.8 | length 44.2
  Top Layer w0.125: v1(38.35,47.425) 38.413,47.488 40.296,47.488 40.583,47.2 U4.142@41.86,47.2 ; v1(51.825,38.175) 52.963,37.037 60.227,37.037 60.927,36.337 61.517,36.337 61.677,36.178 v1(61.677,34.893)
  Layer 1 w0.125: v1(38.35,47.425) 35.6,47.425 35.075,46.9 35.075,38.754 35.579,38.25 42.82,38.25 42.895,38.175 v1(51.825,38.175)
VCC: VT1.3 VT2.3 VT3.3 VT4.3 XP1_1.1 XP1_1.2 XP1_1.3 XP1_1.4 XP1_1.5 XP1_1.6 XP1_2.1 XP1_2.2 XP1_2.3 XP1_2.4 XP1_2.5 XP1_2.6 XP4_1.35 XP4_1.36 XP4_1.37 XP4_1.38 XP4_1.39 XP4_1.40 XP4_2.35 XP4_2.36 XP4_2.37 XP4_2.38 XP4_2.39 XP4_2.40 | length 21.7
  Bottom Layer w0.6: VT1.3@61.1,67.692 63.795,67.692 64.603,66.884 79.124,66.884 79.475,67.236 79.475,70.075 v1(79.457,70.093)
  other v1: 30.997,30.993 32.267,30.993 33.537,30.993 33.537,34.25 30.997,34.893 32.267,34.893 80.727,70.093 81.997,70.093 79.457,73.993 80.727,73.993 81.997,73.993
pads on no net: D3.D4 D4.2 D4.3 D4.10 D4.11 D.9 D.CD P.S TYPE-C. TYPE-C.A8 TYPE-C.B8 TYPE-C.S1 TYPE-C.S2 TYPE-C.S3 TYPE-C.S4 U2.10 U2.11 U3.3 U3.5 U3.6 U3.7 U3.14 U3.15 U4.7 U4.12 U4.13 U4.44 U4.56 U4.57 U4.59 U4.63 U4.65 U4.68 U4.71 U4.76 U4.87 U4.96 U4.97 U4.102 U4.106 U4.118 U4.119 U4.122 U4.128 U4.140 U4.143 XP1_1.15 XP1_1.16 XP1_1.18 XP1_1.20 XP1_1.21 XP1_1.22 XP1_1.23 XP1_1.24 XP1_1.26 XP1_1.28 XP1_1.30 XP1_1.32 XP1_1.35 XP1_2.15 XP1_2.16 XP1_2.18 XP1_2.20 XP1_2.21 XP1_2.22 XP1_2.23 XP1_2.24 XP1_2.26 XP1_2.28 XP1_2.30 XP1_2.32 XP1_2.35 XP2_1.8 XP2_1.10 XP2_1.12 XP2_1.14 XP2_1.16 XP2_1.18 XP2_1.22 XP2_1.32 XP2_1.33 XP2_1.34 XP2_1.35 XP2_1.36 XP2_2.8 XP2_2.10 XP2_2.12 XP2_2.14 XP2_2.16 XP2_2.18 XP2_2.22 XP2_2.32 XP2_2.33 XP2_2.34 XP2_2.35 XP2_2.36 XP3_1.5 XP3_1.7 XP3_1.13 XP3_1.15 XP3_1.16 XP3_1.17 XP3_1.18 XP3_1.19 XP3_1.20 XP3_1.21 XP3_1.22 XP3_1.31 XP3_1.33 XP3_1.34 XP3_2.5 XP3_2.7 XP3_2.13 XP3_2.15 XP3_2.16 XP3_2.17 XP3_2.18 XP3_2.19 XP3_2.20 XP3_2.21 XP3_2.22 XP3_2.31 XP3_2.33 XP3_2.34 XP4_1.6 XP4_1.8 XP4_1.11 XP4_1.13 XP4_1.18 XP4_1.19 XP4_1.20 XP4_1.21 XP4_1.23 XP4_1.25 XP4_1.26 XP4_2.6 XP4_2.8 XP4_2.11 XP4_2.13 XP4_2.18 XP4_2.19 XP4_2.20 XP4_2.21 XP4_2.23 XP4_2.25 XP4_2.26

## Polygon pours and split planes (outlines as drawn)
GND on Top Layer "NONET_L-01_P-001" (solid, remove dead copper, pour order 57): 30,75 30,30 83,30 83,75
GND on Top Layer "NONET_L-01_P-001" (solid, remove dead copper, pour order 52): 30.775,74.5 33.765,74.5 33.765,68.6 30.775,68.6
GND on Top Layer "NONET_L-01_P-001" (solid, remove dead copper, pour order 54): 53.125,74.625 53.125,68.575 53.25,68.45 59.65,68.45 59.65,74.65
GND on Top Layer "NONET_L-01_P-001" (solid, remove dead copper, pour order 51): 79.235,36.4 79.235,30.5 82.225,30.5 82.225,36.4
3V3 on Top Layer "NONET_L-01_P-001" (solid, remove dead copper, pour order 45): 77.489,68.6 78.064,68.025 82.6,68.025 82.6,64.2 82.65,64.15 82.6,64.1 82.6,42.25 81.005,42.25 81.075,42.32 81.075,66.925 76.425,66.925 76.325,67.025 76.325,68.6
3V3 on Top Layer "NONET_L-01_P-001" (solid, remove dead copper, pour order 37): 35.5,36.4 35.5,30.5 36.625,30.5 36.625,36.4
4V2 on Top Layer "NONET_L-01_P-001" (solid, remove dead copper, pour order 42): 73.876,74.5 76.325,74.5 76.325,68.6 73.876,68.6
3V3 on Top Layer "NONET_L-01_P-001" (solid, remove dead copper, pour order 41): 76.325,74.5 77.5,74.5 77.5,68.6 76.325,68.6
5V on Top Layer "NONET_L-01_P-001" (solid, remove dead copper, pour order 40): 77.624,74.5 78.9,74.5 78.9,68.6 77.624,68.6
VCC on Top Layer "NONET_L-01_P-001" (solid, remove dead copper, pour order 39): 78.9,74.5 78.9,68.6 82.55,68.6 82.55,74.5
4V2 on Top Layer "NONET_L-01_P-001" (solid, remove dead copper, pour order 38): 36.85,36.4 36.85,30.5 39.225,30.5 39.225,36.4
5V on Top Layer "NONET_L-01_P-001" (solid, remove dead copper, pour order 36): 34.25,36.4 35.375,36.4 35.375,30.5 34.25,30.5
VCC on Top Layer "NONET_L-01_P-001" (solid, remove dead copper, pour order 35): 30.5,36.4 30.5,30.5 34.15,30.5 34.15,36.4
3V3 on Top Layer "NONET_L-01_P-001" (solid, remove dead copper, pour order 33): 39.125,45.225 40.125,45.225 41.125,45.225 41.125,46.319 41.135,46.33 42.585,46.33 42.585,45.335 41.375,44.125 39.125,44.125
3V3 on Top Layer "NONET_L-01_P-001" (solid, remove dead copper, pour order 32): 35.3,51.725 35.3,49.35 33.7,49.35 33.7,50.15 33.7,52.825 36.65,52.825 36.65,51.725
3V3 on Top Layer "NONET_L-01_P-001" (solid, remove dead copper, pour order 31): 35.65,52.825 35.65,51.725 39.85,51.75 39.85,52.85
3V3 on Top Layer "NONET_L-01_P-001" (solid, remove dead copper, pour order 30): 46.9,38.2 39.5,38.2 39.5,37.1 46.9,37.1
3V3_SEN on Top Layer "NONET_L-01_P-001" (solid, remove dead copper, shelved, pour order 28): 75.925,55.175 76.825,55.175 77.475,55.825 77.975,55.825 77.975,58.325 77.95,58.3 76.35,58.3 76.35,56.25 75.625,55.525 75.625,55.05
3V3 on Top Layer "NONET_L-01_P-001" (solid, remove dead copper, shelved, pour order 26): 39.4,38.4 39.339,38.339 39.339,36.943 47.368,36.943 47.475,37.05 47.475,38.4
4V2 on Top Layer "NONET_L-01_P-001" (solid, remove dead copper, shelved, pour order 19): 73.725,74.65 73.725,68.35 73.8,68.275 76.15,68.275 76.15,74.625 76.075,74.7
3V3 on Top Layer "NONET_L-01_P-001" (solid, remove dead copper, shelved, pour order 18): 76.3,74.675 76.325,74.65 76.325,68.4 77.475,68.4 77.5,68.375 77.5,74.608
5V on Top Layer "NONET_L-01_P-001" (solid, remove dead copper, shelved, pour order 17): 77.5,74.7 77.5,68.375 77.575,68.3 78.65,68.3 78.65,74.65
VCC on Top Layer "NONET_L-01_P-001" (solid, remove dead copper, shelved, pour order 16): 78.85,74.625 78.9,74.575 78.9,68.3 82.7,68.3 82.775,68.375 82.775,74.625
3V3_SEN on Top Layer "NONET_L-01_P-001" (solid, remove dead copper, shelved, pour order 12): 77.725,53.35 77.75,53.325 78.525,53.325 78.525,49.925 77.7,49.1 74.725,49.1 74.725,50.075 74.7,50.1 75.05,50.45 77.9,50.45 77.9,51.825 77.725,52
3V3_SEN on Top Layer "NONET_L-01_P-001" (solid, remove dead copper, shelved, pour order 11): 75.625,55.525 76.2,55.525 76.225,55.55 76.225,54.425 78.275,54.425 78.3,54.4 78.25,54.35 78.25,52.975 77.1,52.975 75.625,54.45
3V3_SEN on Top Layer "NONET_L-01_P-001" (solid, remove dead copper, shelved, pour order 9): 76.55,41.35 76.6,41.3 76.6,40.1 78.875,40.1 78.95,40.175 78.95,41.325
3V3_SEN on Top Layer "NONET_L-01_P-001" (solid, remove dead copper, shelved, pour order 8): 81.75,38.375 81.75,36.875 75.975,36.875 75.75,37.1 75.75,37.95 75.9,37.95 76.15,38.2 77.6,38.2 77.6,37.3 77.575,37.275 79.9,37.275 79.9,37.975 80.3,38.375
5V on Top Layer "NONET_L-01_P-001" (solid, remove dead copper, shelved, pour order 7): 56.125,37.125 57.95,37.125 57.975,37.1 58.025,37.15 58.025,38.625 60,38.625 60.65,39.275 60.65,39.925 57.925,39.925 57.9,39.95 56.475,38.525 56.15,38.525
GND on Top Layer "NONET_L-01_P-001" (solid, remove dead copper, shelved, pour order 6): 53.225,36.85 53.225,30.9 59.85,30.9 59.85,36.85
GND on Top Layer "NONET_L-01_P-001" (solid, remove dead copper, shelved, pour order 5): 79,36.525 79,30.2 82.65,30.2 82.65,36.5
4V2 on Top Layer "NONET_L-01_P-001" (solid, remove dead copper, shelved, pour order 4): 36.8,36.425 36.85,36.375 36.85,30.225 39.3,30.225 39.225,30.3 39.225,36.525
GND on Top Layer "NONET_L-01_P-001" (solid, remove dead copper, shelved, pour order 0): 30.5,74.825 30.475,74.8 30.475,68.2 33,68.2 32.95,68.25 32.95,74.85
3V3 on Top Layer "NONET_L-01_P-001" (solid, remove dead copper, shelved, pour order 27): 33.425,49.275 35.65,49.275 35.65,50.875 36.15,51.375 40.25,51.375 40.25,52.883 40.033,53.1 33.375,53.1
3V3 on Top Layer "NONET_L-01_P-001" (solid, remove dead copper, shelved, pour order 10): 82.825,58.75 82.825,57.025 81.375,57.025 81.35,57 81.4,56.95 81.4,53.1 82.625,53.1 82.8,52.925 82.8,51.1 81.675,51.1 81.5,50.925 81.5,43.675 82.875,43.675 82.975,43.575 82.975,41.575 81.05,41.575 81.025,41.6 81.025,58.75
3V3 on Top Layer "NONET_L-01_P-001" (solid, remove dead copper, shelved, pour order 3): 35.7,36.5 35.7,30.175 36.575,30.175 36.575,36.413 36.488,36.5
5V on Top Layer "NONET_L-01_P-001" (solid, remove dead copper, shelved, pour order 2): 34.4,36.55 34.375,36.525 34.375,30.15 35.4,30.15 35.425,30.125 35.5,30.2 35.5,36.55
VCC on Top Layer "NONET_L-01_P-001" (solid, remove dead copper, shelved, pour order 1): 30.325,36.55 30.325,30.175 34.15,30.175 34.15,36.525
GND on Bottom Layer "NONET_L-01_P-001" (solid, remove dead copper, pour order 58): 30,75 30,30 83,30 83,75
3V3 on Bottom Layer "NONET_L-01_P-001" (solid, remove dead copper, pour order 44): 49.1,40.5 55.5,40.5 55.5,39.4 49.1,39.4
3V3_SEN on Bottom Layer "NONET_L-01_P-001" (solid, remove dead copper, pour order 43): 56.498,43.4 56.498,46.925 58.199,46.925 58.199,43.4
3V3 on Bottom Layer "NONET_L-01_P-001" (solid, remove dead copper, pour order 34): 44.45,61.75 47.475,61.75 47.475,63.275 47.378,63.372 44.679,63.372 44.679,67.921 44.5,68.1 43.4,68.1 43.4,62.8
VCC on Bottom Layer "NONET_L-01_P-001" (solid, remove dead copper, pour order 29): 49.621,68.353 49.621,67.032 61.379,67.032 61.379,68.353
5V on Bottom Layer "NONET_L-01_P-001" (solid, remove dead copper, shelved, pour order 24): 58.675,50.925 56.1,50.925 55.225,51.8 55.225,52.95 53.6,52.95 53.55,52.9 53.55,51.25 54.65,51.25 55.15,50.75 55.15,49.175 58.7,49.175
3V3 on Bottom Layer "NONET_L-01_P-001" (solid, remove dead copper, shelved, pour order 22): 58.425,48.5 58.425,46.95 62.075,46.95 62.1,46.925 62.1,44.55 63.525,44.55 63.55,44.525 63.575,44.55 63.575,47.25 62.95,47.25 61.7,48.5
3V3 on Bottom Layer "NONET_L-01_P-001" (solid, remove dead copper, shelved, pour order 20): 48.8,40.65 48.8,39.025 55.425,39.025 55.45,39.05 55.45,40.625
3V3_SEN on Bottom Layer "NONET_L-01_P-001" (solid, remove dead copper, shelved, pour order 14): 74.475,59.075 74.5,59.05 74.5,57.375 76.375,57.375 76.45,57.3 76.45,56 78,56 78,59.05
3V3_SEN on Bottom Layer "NONET_L-01_P-001" (solid, remove dead copper, shelved, pour order 13): 76.325,48.85 76.3,48.825 74.275,48.825 74.275,50.325 74.25,50.35 72.6,50.35 72.6,48.3 72.575,48.275 77.925,48.275 77.925,53.375 78.05,53.5 77.775,53.775 77.75,53.775 76.325,52.35
3V3_SEN on Bottom Layer "NONET_L-01_P-001" (solid, remove dead copper, shelved, pour order 25): 56.075,46.075 56.075,43.9 56.975,43 57.775,43 58.875,44.1 58.3,44.675 58.3,46.075
3V3 on Bottom Layer "NONET_L-01_P-001" (solid, remove dead copper, shelved, pour order 23): 55.6,51.4 57.1,51.4 57.1,52.925 57.825,53.65 61.95,53.65 61.95,55.175 61.825,55.3 61.6,55.075 55.625,55.075
3V3 on Bottom Layer "NONET_L-01_P-001" (solid, remove dead copper, shelved, pour order 21): 58.65,40.95 58.65,38.65 58.675,38.625 61.725,38.625 61.725,40.925
GND on Layer 2 "NONET_L-01_P-001" (solid, remove dead copper, pour order 56): 30,75 30,30 83,30 83,75
GND on Layer 2 "NONET_L-01_P-001" (solid, remove dead copper, pour order 53): 53.25,35.3 53.325,35.225 53.325,30.5 59.675,30.5 59.825,30.65 59.825,35.35
GND on Layer 1 "NONET_L-01_P-001" (solid, remove dead copper, pour order 59): 30,75 30,30 83,30 83,75
VCC on Layer 1 "NONET_L-01_P-001" (solid, remove dead copper, pour order 55): 30.7,33.875 34.225,33.875 34.225,72.8 34.15,72.875 34.6,73.325 82.9,73.325 82.9,74.575 82.625,74.85 30.2,74.85 30.2,33.875 30.175,33.85

## Text inside footprints (layer, text, board x,y; h text height)
TYPE-C: Mechanical 13 "PCB EDGE" at 29.7,57.8 h0.61 r270